# Altium PCB Pillpal_PCB02.PcbDoc
Units mm, origin at the board's own origin, x right, y up, seen from the top; angles counter-clockwise.
Board outline 54 x 65.75 mm, 2 copper layers (Top Layer, Bottom Layer); 30 components, 29 nets, 132 pads, 14 vias.
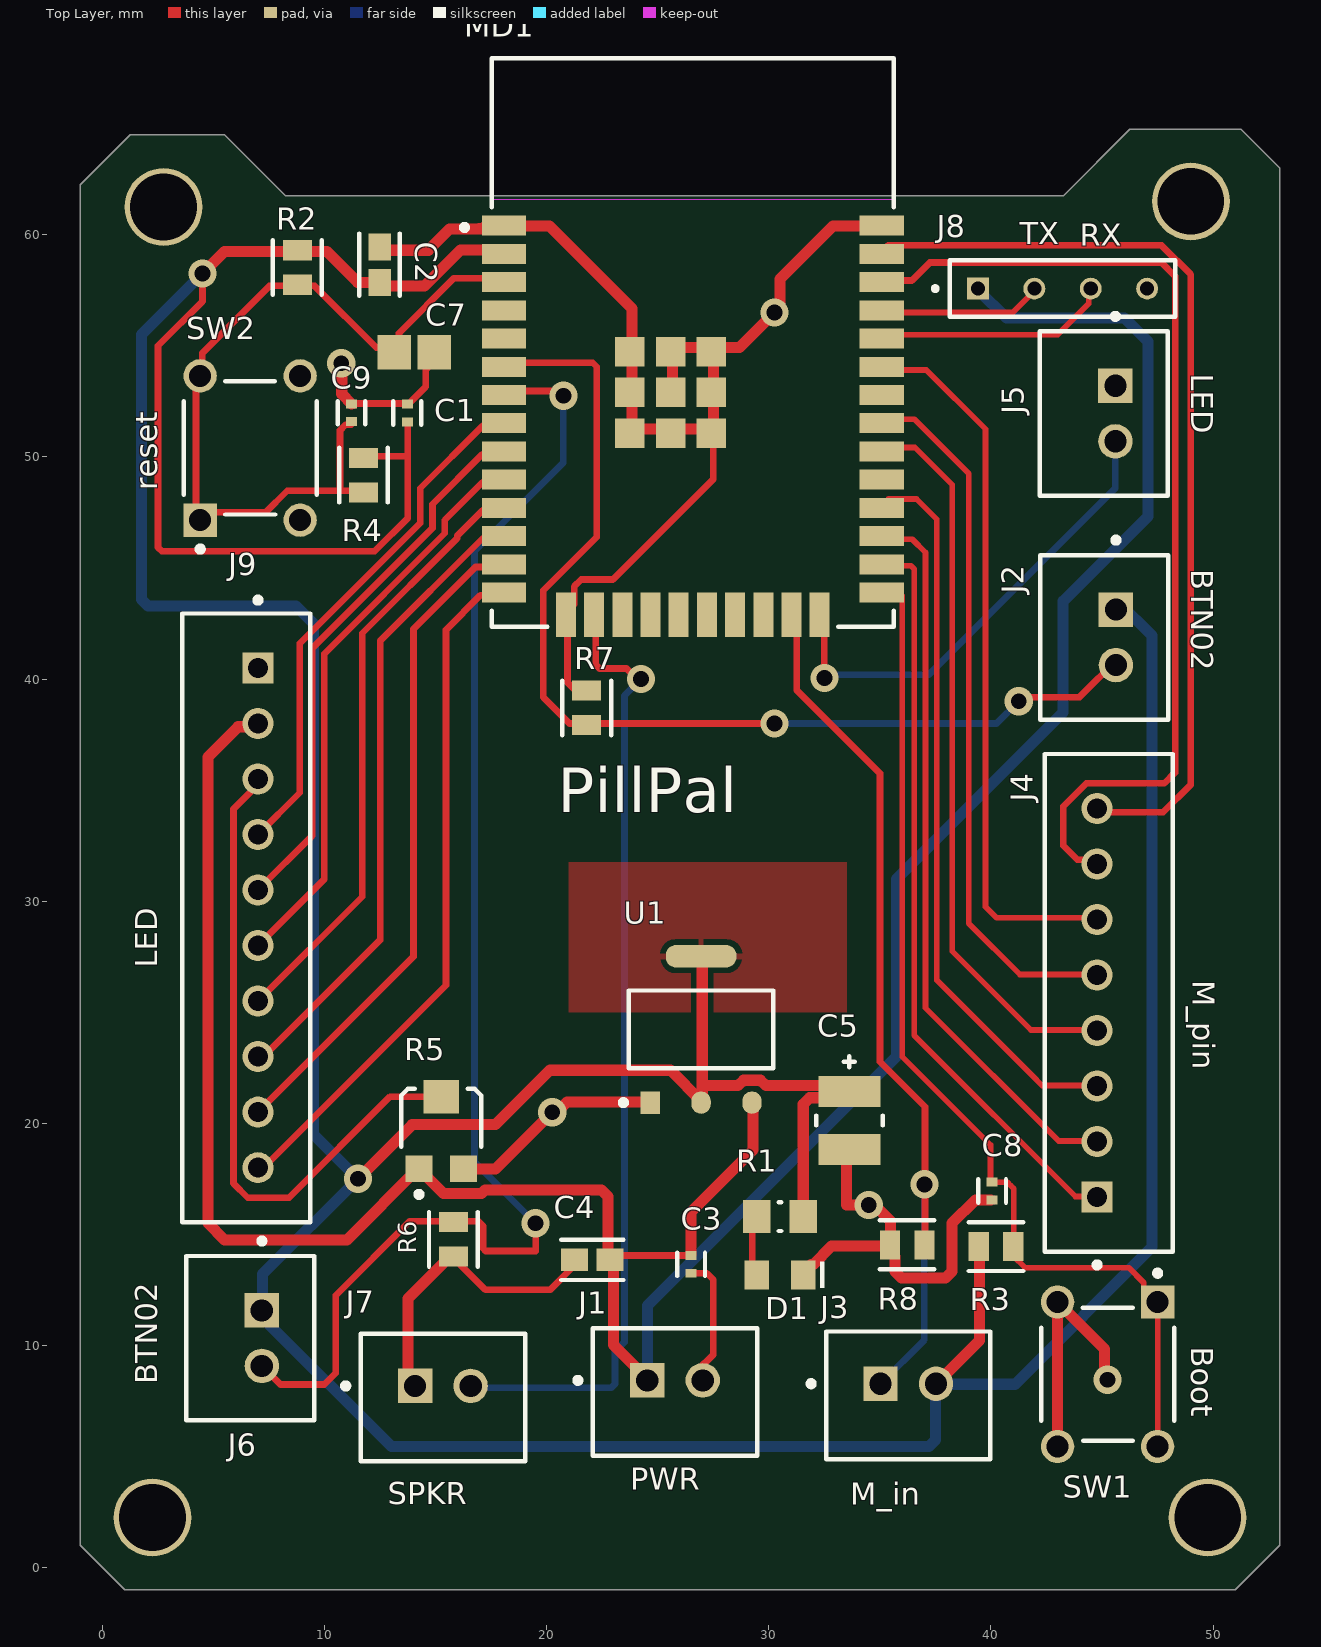
[diagram p0: Top Layer view]
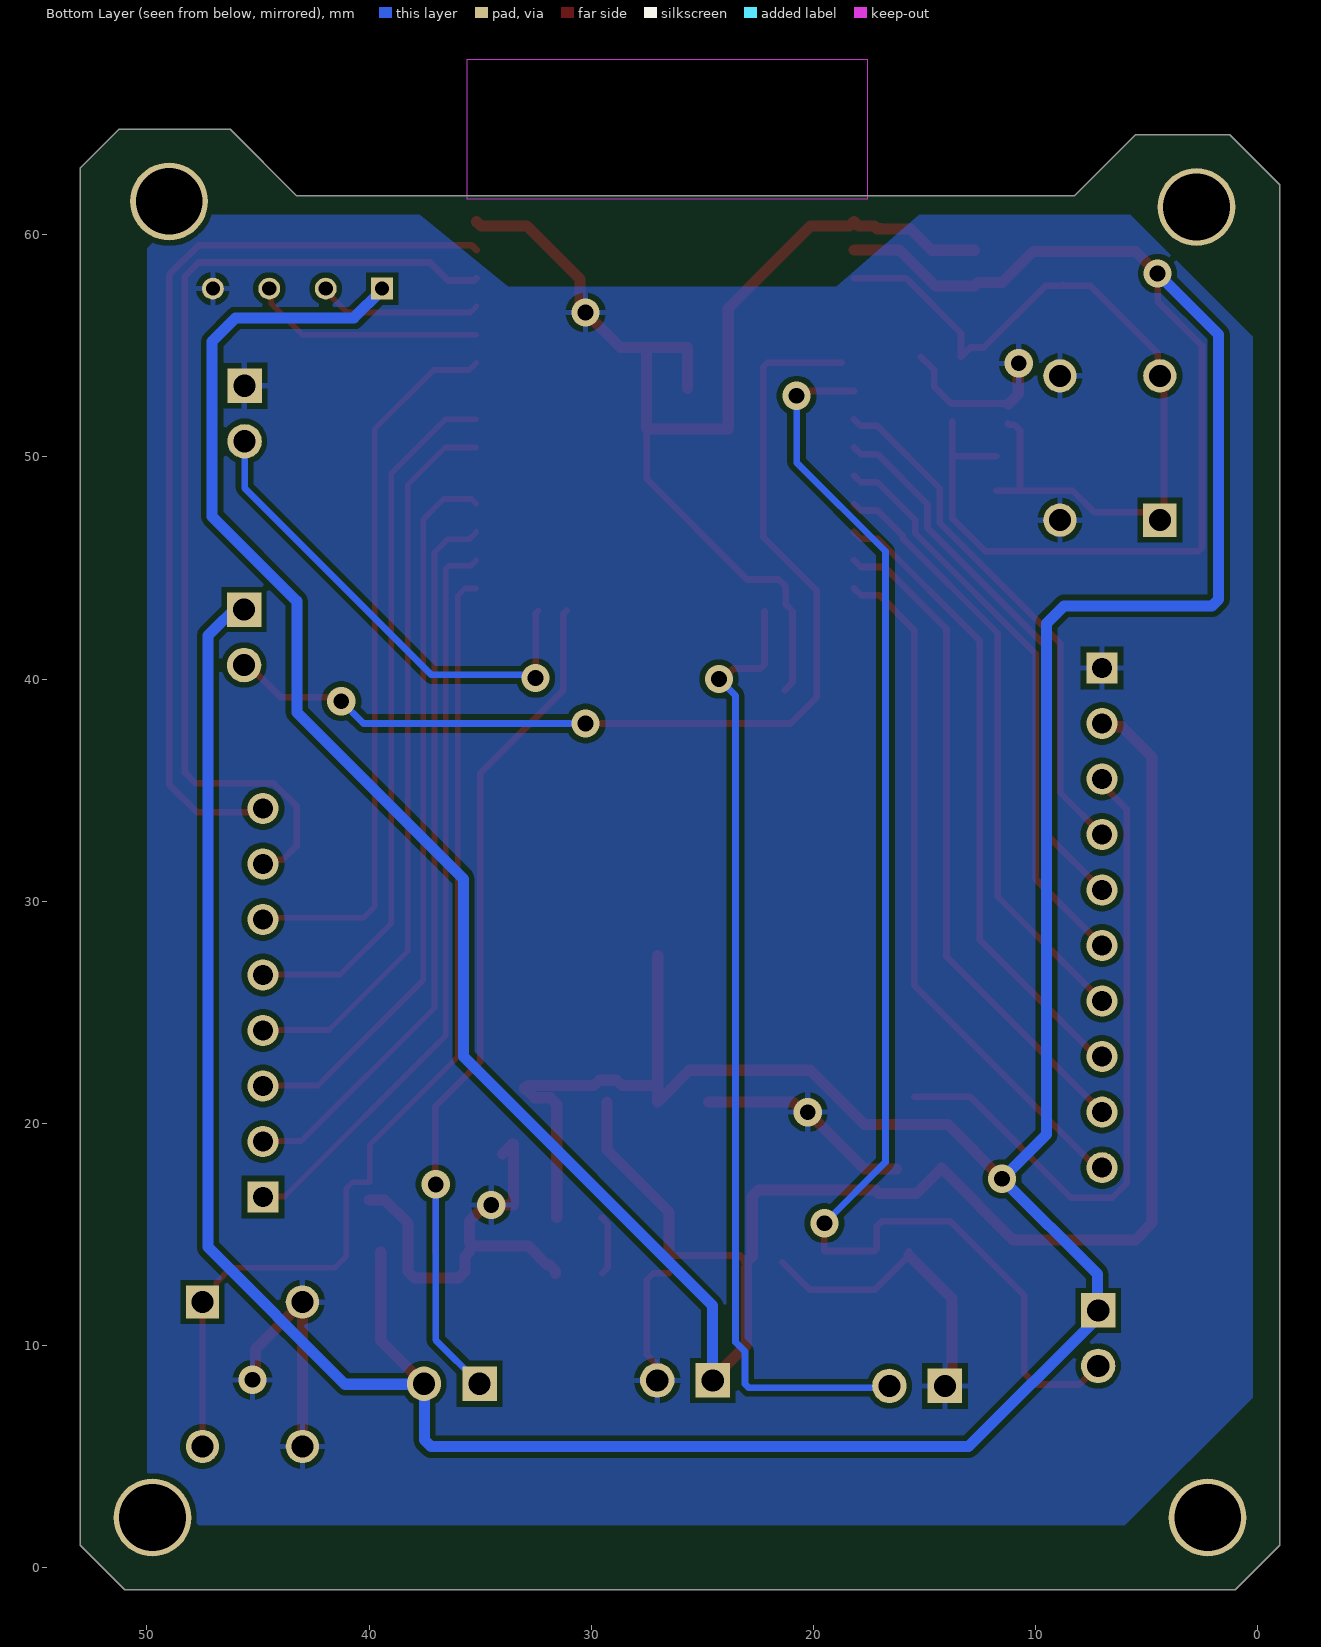
[diagram p1: Bottom Layer view, seen from below]
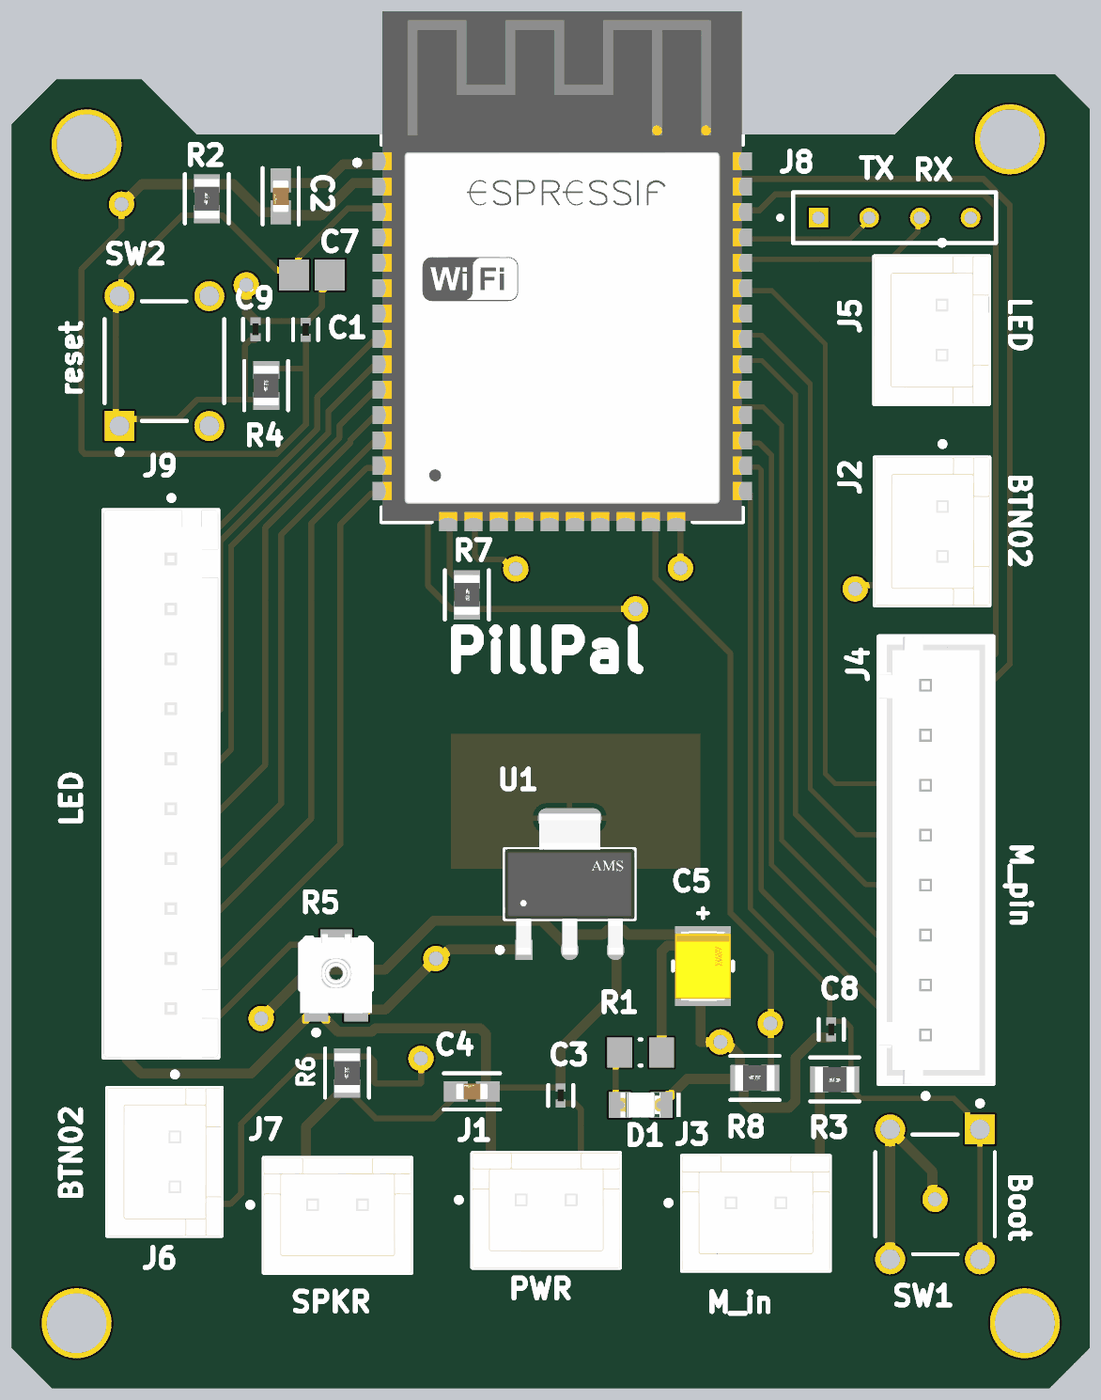
[diagram p2: 3D render of the assembled board from above, using the file's embedded part models]

## Layer stack, top to bottom
Top Solder: solder mask 0.0102, Solder Resist, Dk 3.5
Top Layer: signal copper 0.0356
Dielectric 1: dielectric 0.32, FR-4, Dk 4.8
Bottom Layer: signal copper 0.0356
Bottom Solder: solder mask 0.0102, Solder Resist, Dk 3.5

## Board outline
-1,1 1,-1 51,-1 53,1 53,63 51.25,64.75 46.25,64.75 43.25,61.75 8.25,61.75 5.5,64.5 1.25,64.5 -1,62.25

## Design rules (kind name [scope] priority, off if disabled: settings)
Clearance Clearance_1 [OnMid vs OnMid] p1: gap=0.254 ignorepadtopadclearanceinfootprint=FALSE except(0: Arc-Hole Track-Hole SMDPad-Hole THPad-Hole Via-Hole Fill-Hole Poly-Hole Region-Hole Text-Hole Hole-Hole) sourcerule=36 cellrowname=All cellrowtype=0 cellcolname=All cellcoltype=0 innerlayers=TRUE
Clearance Clearance_2 [(ExistsOnLayer('Top Layer') Or ExistsOnLayer('Bottom Layer')) vs (ExistsOnLayer('Top Layer') Or ExistsOnLayer('Bottom Layer'))] p2: gap=0.254 ignorepadtopadclearanceinfootprint=FALSE except(0: Arc-Hole Track-Hole SMDPad-Hole THPad-Hole Via-Hole Fill-Hole Poly-Hole Region-Hole Text-Hole Hole-Hole) sourcerule=36 cellrowname=All cellrowtype=0 cellcolname=All cellcoltype=0 outerlayers=TRUE
Clearance [All] p3: gap=0.254 ignorepadtopadclearanceinfootprint=FALSE ismatrix=TRUE
HoleSize [All] p1: absolutevalues=TRUE maxlimit=3.5 minlimit=0.025 maxpercent=80.000 minpercent=20.000
MinimumSolderMaskSliver [All] p1: minsoldermaskwidth=0.09
PolygonConnect [All] p1: connectstyle=Relief reliefconductorwidth=0.254 reliefentries=4 polygonreliefangle="90 Angle" airgapwidth=0.254
RoutingVias [All] p1: holewidth=0.711 width=1.27 viastyle="Through Hole" minholewidth=0.711 minwidth=1.27 maxholewidth=0.711 maxwidth=1.27
SilkToSolderMaskClearance [IsPad] p1: minsilkscreentomaskgap=0.18 clearancetoexposedcopper=TRUE
SolderMaskExpansion [All] p1: expansion=0.102 istentingtop=FALSE
Width [All] p1: maxlimit=0.5 minlimit=0.254 preferedwidth=0.3 minimp=50.000000 maximp=50.000000 favimp=50.000000
27 further rules are at their usual default settings.

## Components (designator, comment, footprint, x,y, rotation, side; value= is the part's Value field where it differs from the comment)
C1 "0.1uF" FP-GRM15-MFG 13.725,51.975 r90 top value=0.10μF
C2 "10uF" FP-GRM188-0_1-e0_2_0_55-IPC_A 12.475,58.65 r270 top
C3 "0.1uF" FP-GRM15-MFG 26.5,13.65 r90 top value=0.10μF
C4 "10uF" FP-GRM188-0_1-e0_2_0_55-IPC_A 22.05,13.85 r180 top
C5 "TAJB226K016RNJ" FP-TAJB-MFG 33.625,20.125 r90 top
C7 "1uF" CAPC2013X145X50ML20T25 14.038,54.712 r180 top
C8 "0.1uF" FP-GRM15-MFG 40.05,16.95 r90 top value=0.10μF
C9 "0.1uF" FP-GRM15-MFG 11.212,51.987 r270 top value=0.10μF
D1 "150080RS75000" WL-SMCW_0805_150080xx75000 30.5,13.175 r180 top
J1 "B2B-XH-A(LF)(SN)" FP-B2B-XH-A_LF_SN-MFG 25.775,7.9 r0 top
J2 "B2B-XH-A(LF)(SN)" FP-B2B-XH-A_LF_SN-MFG 45.1,41.875 r270 top
J3 "B2B-XH-A(LF)(SN)" FP-B2B-XH-A_LF_SN-MFG 36.275,7.75 r0 top
J4 "B8B-XH-A(LF)(SN)" FP-B8B-XH-A_LF_SN-MFG 45.3,25.425 r270 top
J5 "B2B-XH-A(LF)(SN)" FP-B2B-XH-A_LF_SN-MFG 45.075,51.95 r270 top
J6 "B2B-XH-A(LF)(SN)" FP-B2B-XH-A_LF_SN-MFG 6.65,10.325 r270 top
J7 "B2B-XH-A(LF)(SN)" FP-B2B-XH-A_LF_SN-MFG 15.325,7.65 r0 top
J8 "TS-104-T-A" SAMTEC_TS-104-T-A 43.22,57.575 r0 top
J9 "B10B-XH-A(LF)(SN)" FP-B10B-XH-A_LF_SN-MFG 6.475,29.25 r90 top
MD1 "ESP32-WROOM-32D" FP-ESP32-WROOM-32D-MFG 26.575,55.145 r0 top
R1 "75R 1% 0805(2012)" RESC0805(2012)_M 30.5,15.8 r180 top value="75.00 Ohm"
R2 "10k" FP-CRG0805-IPC_C 8.775,58.525 r90 top
R3 "10k" FP-CRG0805-IPC_C 40.225,14.45 r180 top
R4 "10k" FP-CRG0805-IPC_C 11.75,49.175 r90 top
R5 "TC33X-2-103E" BOUR-TC33X-2_V 15.25,19.75 r90 top
R6 "10k" FP-CRG0805-IPC_C 15.8,14.775 r90 top
R7 "10k" FP-CRG0805-IPC_C 21.8,38.7 r270 top
R8 "10k" FP-CRG0805-IPC_C 36.225,14.525 r0 top
SW1 "1825910-6" TECO-1825910-6_V 45.25,8.7 r270 top
SW2 "1825910-6" TECO-1825910-6_V 6.65,50.4 r90 top
U1 "AMS1117-3.3" FP-AMS1117-IPC_C 26.95,24.225 r90 top

## Footprints (in the part's own frame and the unit in brackets; to place one, negate y for a bottom-side part, rotate by r counter-clockwise, add the part's x,y. Pads: shape width x height; smd on the part's side, far side on the other; paste and mask are expansions set on the pad)
BOUR-TC33X-2_V [mm] "SMD, 3-Leads, Body 3.8x3.6mm"
  rect 1.2x1.2 smd: 1(-1.8,1) 3(-1.8,-1)
  rect 1.5x1.6 smd: 2(1.45,0)
  silkscreen extent -3.07,-1.8 1.8,1.8, body extent -2,-1.8 1.96,1.8, height 1.15
CAPC2013X145X50ML20T25 [mm] "Chip Capacitor, 2-Leads, Body 2.00x1.25mm, IPC Low Density"
  rect 1.5x1.55 smd: 1(-0.9,0) 2(0.9,0)
  body extent -1.1,-0.72 1.1,0.72, height 1.45
FP-AMS1117-IPC_C [mm]
  rect 1.004x0.872 smd paste+0 mask+0: 1(-3.295,2.29)
  rrect100% 1.004x0.872 smd paste+0 mask+0: 2(-3.295,0) 3(-3.295,-2.29)
  rrect87% 1.004x3.182 smd paste+0 mask+0: 4(3.295,0)
  silkscreen extent -3.42,-3.25 1.75,3.62, body extent -3.9,-3.35 3.9,3.35, height 0.25
FP-B2B-XH-A_LF_SN-MFG [mm]
  rect 1.55x1.55 hole 1 paste-2539.97 mask+0: 1(-1.25,0.525)
  round 1.55 hole 1 paste-2539.97 mask+0: 2(1.25,0.525)
  silkscreen extent -4.5,-2.88 3.7,2.88, body extent -3.8,-2.98 3.8,2.98, height 0.25
FP-B8B-XH-A_LF_SN-MFG [mm]
  rect 1.4x1.4 hole 0.9 paste-2539.97 mask+0: 1(8.75,-0.525)
  round 1.4 hole 0.9 paste-2539.97 mask+0: 2(6.25,-0.525) 3(3.75,-0.525) 4(1.25,-0.525) 5(-1.25,-0.525) 6(-3.75,-0.525) 7(-6.25,-0.525) 8(-8.75,-0.525)
  silkscreen extent -11.2,-2.88 11.92,2.88, body extent -11.3,-2.98 11.3,2.98, height 0.25
FP-B10B-XH-A_LF_SN-MFG [mm]
  rect 1.4x1.4 hole 0.9 paste-2539.97 mask+0: 1(11.25,-0.525)
  round 1.4 hole 0.9 paste-2539.97 mask+0: 2(8.75,-0.525) 3(6.25,-0.525) 4(3.75,-0.525) 5(1.25,-0.525) 6(-1.25,-0.525) 7(-3.75,-0.525) 8(-6.25,-0.525) 9(-8.75,-0.525) 10(-11.25,-0.525)
  silkscreen extent -13.7,-2.88 14.42,2.88, body extent -13.8,-2.98 13.8,2.98, height 0.25
FP-CRG0805-IPC_C [mm]
  rect 0.906x1.307 smd paste+0 mask+0: 1(-0.776,0) 2(0.776,0)
  silkscreen extent -1.23,-1.1 1.23,1.1, body extent -1.33,-0.8 1.33,0.8, height 0.25
FP-ESP32-WROOM-32D-MFG [mm]
  rect 2x0.9 smd paste+0 mask+0: 1(-8.5,5.26) 2(-8.5,3.99) 3(-8.5,2.72) 4(-8.5,1.45) 5(-8.5,0.18) 6(-8.5,-1.09) 7(-8.5,-2.36) 8(-8.5,-3.63) 9(-8.5,-4.9) 10(-8.5,-6.17) 11(-8.5,-7.44) 12(-8.5,-8.71) 13(-8.5,-9.98) 14(-8.5,-11.25) 25(8.5,-11.25) 26(8.5,-9.98) 27(8.5,-8.71) 28(8.5,-7.44) 29(8.5,-6.17) 30(8.5,-4.9) 31(8.5,-3.63) 32(8.5,-2.36) 33(8.5,-1.09) 34(8.5,0.18) 35(8.5,1.45) 36(8.5,2.72) 37(8.5,3.99) 38(8.5,5.26)
  rect 0.9x2 smd paste+0 mask+0: 15(-5.715,-12.25) 16(-4.445,-12.25) 17(-3.175,-12.25) 18(-1.905,-12.25) 19(-0.635,-12.25) 20(0.635,-12.25) 21(1.905,-12.25) 22(3.175,-12.25) 23(4.445,-12.25) 24(5.715,-12.25)
  rect 1.33x1.33 smd paste+0 mask+0: 39(-2.835,-4.075) 39(-2.835,-2.24) 39(-2.835,-0.405) 39(-1,-4.075) 39(-1,-2.24) 39(-1,-0.405) 39(0.835,-4.075) 39(0.835,-2.24) 39(0.835,-0.405)
  Keep-Out Layer region: -9,6.45 9,6.45 9,12.75 -9,12.75
  Keep-Out Layer region: -9,6.45 9,6.45 9,12.75 -9,12.75
  silkscreen extent -10.4,-12.8 9.05,12.8, body extent -9.6,-13.35 9.6,12.9, height 0.25
FP-GRM15-MFG [mm]
  rect 0.4x0.5 smd paste+0 mask+0: 1(-0.4,0) 2(0.4,0)
  silkscreen extent -0.53,-0.63 0.53,0.63, body extent -0.7,-0.38 0.7,0.38, height 0.25
FP-GRM188-0_1-e0_2_0_55-IPC_A [mm]
  rect 1.208x1.012 smd paste+0 mask+0: 1(-0.802,0) 2(0.802,0)
  silkscreen extent -1.41,-0.91 1.41,0.91, body extent -1.91,-1.01 1.91,1.01, height 0.25
FP-TAJB-MFG [mm]
  rect 1.4x2.8 smd paste+0 mask+0: 1(-1.3,0) 2(1.3,0)
  silkscreen extent -0.23,-1.5 2.9,1.5, body extent -2.1,-1.6 2.1,1.6, height 0.25
RESC0805(2012)_M [mm] "Chip Resistor, Body 2.0x1.3mm, IPC Low Density"
  rect 1.25x1.5 smd: 1(-1.05,0) 2(1.05,0)
  silkscreen extent -0.05,-0.65 0.05,0.65, body extent -1.1,-0.67 1.1,0.67, height 0.7
SAMTEC_TS-104-T-A [mm]
  rect 0.985x0.985 hole 0.635: 01(-3.81,0)
  round 0.985 hole 0.635: 02(-1.27,0) 03(1.27,0) 04(3.81,0)
  silkscreen extent -5.83,-1.27 5.08,1.27
TECO-1825910-6_V [mm] "Switch, 4-Leads, Body 5.99x5.99mm"
  rect 1.5x1.5 hole 0.99: 1(-3.25,2.25)
  round 1.5 hole 0.99: 2(3.25,2.25) 3(-3.25,-2.25) 4(3.25,-2.25)
  silkscreen extent -4.67,-2.99 2.99,3, body extent -3,-2.99 2.99,3, height 5
WL-SMCW_0805_150080xx75000 [mm] "SMD Mono-color Chip LED, body 2.0x1.25mm"
  rect 1.1x1.3 smd: 1(-1.05,0) 2(1.05,0)
  silkscreen extent -2,-0.6 -1.8,0.6, body extent -1,-0.63 1,0.62, height 0.7

## Part data
C1 C3 C8 C9: library part CMP-2100-03641-2, "CAP CER 0.1UF 16V X7R 0402", Capacitance=0.10μF, Manufacturer=Murata, Manufacturer Part Number=GRM155R71C104KA88D, Package=GRM15, Temperature="-55°C to +125°C", Temperature Characteristic=X7R, Temperature Range High=+125°C, Temperature Range Low=-55°C, Tolerance=10%, Voltage Rating=16Vdc, Category=Cap, ComponentLink2Description=Datasheet, ComponentLink2URL=https://search.murata.co.jp/Ceramy/image/img/A01X/G101/ENG/GRM155R71H471KA01-01A.pdf, Device Class L1="Passive Components", Device Class L2=Capacitors, Device Class L3="Ceramic Capacitors", Digikey Description="CAP CER 0.1UF 16V X7R 0402", Height=0.55mm, Ipc Land Pattern Name=CAPC10050X219, Lead Free=yes, Material=Ceramic, Mouser Description="0402 0.1 uF 16V ±10 % Tolerance X7R SMT Multilayer Ceramic Capacitor", Octopart=https://octopart.com/grm155r71c104ka88d-murata-196880, RoHS=TRUE, Standoff Height=0mm
C2 C4: library part CMP-2006-02792-2, "Chip Multilayer Ceramic Capacitors for General Purpose, 0603, 10uF, X5R, 15%, 20%, 6.3V", Case Code (Imperial)=0603, Case Code (Metric)=1608, Dielectric=X5R, Max Operating Temperature=85°C, Min Operating Temperature=-55°C, Package Quantity=4000, Tolerance=20%, Voltage=6.3V, Capacitance=10uF, Case/Package=0603, Depth=0.8mm, Height=0.8mm, Lead Free="Lead Free", Length=1.6mm, Material=Ceramic, Mount="Surface Mount", Packaging="Tape and Reel", Radiation Hardening=No, REACH SVHC="No SVHC", Termination=SMD/SMT, Thickness=0.035inch, Voltage Rating=6.3V, Voltage Rating (DC)=6.3V, Width=0.031inch
C5: library part CMP-2100-03689-2, "22uF 16V  ±10% 2.3Ω 1210  SMD Tantalum Capacitor", Capacitance=22uF, Case Code (Imperial)=1210, Case Code (Metric)=3528, Dielectric Material=Tantalum, ESR (Equivalent Series Resistance)=2.3R, Leakage Current=3.5uA, Max Operating Temperature=125°C, Min Operating Temperature=-55°C, Package Quantity=1, Tolerance=10%, Voltage=16V, Case/Package=1210, Construction=Flat, Depth=2.8mm, Dissipation Factor=6%, Features="General Purpose", Height=1.9mm, Height - Seated (Max)=0.083inch, Lead Free="Lead Free", Length=3.5mm, Mount="Surface Mount", Number of Pins=2, Packaging="Tape and Reel", Polarity=Polar, Radiation Hardening=No, REACH SVHC="No SVHC", RoHS Compliant=Yes, Series=TAJ, Termination=SMD/SMT, Voltage Rating=16V, Voltage Rating (DC)=16V, Width=2.8mm
C7: library part CMP-1036-04731-2, Manufacturer=Kemet, Part Number=C0805C105K9PACTU
D1: library part CMP-1426-00011-2, Case Code (Imperial)=0805, Case Code (Metric)=2012, Color=Red, Forward Current=100mA, Forward Voltage=2V, Max Operating Temperature=85°C, Max Reverse Voltage (DC)=5V, Min Operating Temperature=-40°C, Test Current=20mA, Case/Package=0805, Dominant Wavelength=625nm, Height=700µm, Length=2mm, Lens Style="Clear, Rectangular", Luminous Intensity=150mcd, Mount="Surface Mount", NexarPartId=29717781, Packaging="Tape and Reel", Peak Wavelength=630nm, REACH SVHC=Unknown, RoHS=Compliant, Viewing Angle=140°, Wavelength=625nm, Width=1.25mm
J1 J2 J3 J5 J6 J7: library part CMP-2000-05888-3, "CONN HEADER VERT 2POS 2.5MM", Color=Natural, Contact Resistance=20mR, Current Rating=3A, Housing Color=White, Insulation Resistance=1GR, Max Operating Temperature=85°C, Max Voltage Rating (AC)=250V, Min Operating Temperature=-25°C, Connector Type="Male Pin", Contact Material=Brass, Contact Plating=Tin, Contact Type="Male Pin", Depth=5.75mm, Fastening Type=Detent, Housing Material=Polyamide, Lead Free="Lead Free", Lead Pitch=2.5mm, Length=7.4mm, Max Current Rating=3A, Max Voltage Rating (DC)=250V, Mount="Through Hole", Number of Contacts=2, Number of Positions=2, Number of Rows=1, Orientation=Straight, Packaging=Bulk, Pitch=2.5mm, REACH SVHC="No SVHC", Series=XH, Termination=Solder, Voltage Rating=250V, Voltage Rating (AC)=250V, Wire/Cable Gauge=22AWG
J4: library part CMP-17438-000015-1, "CONN HEADER VERT 8POS 2.5MM", Color=Natural, Contact Resistance=20mR, Current Rating=3A, Housing Color=White, Insulation Resistance=1GR, Max Operating Temperature=85°C, Max Voltage Rating (AC)=250V, Min Operating Temperature=-25°C, Connector Type="Male Pin", Contact Material=Brass, Contact Plating=Tin, Contact Type="Male Pin", Depth=5.75mm, Fastening Type=Detent, Housing Material=Polyamide, Lead Free="Lead Free", Lead Pitch=2.5mm, Length=22.4mm, Max Current Rating=3A, Mount="Through Hole", Number of Contacts=8, Number of Positions=8, Number of Rows=1, Orientation=Straight, Packaging=Bulk, Pitch=2.5mm, REACH SVHC="No SVHC", Series=XH, Termination=Press-Fit, Voltage Rating=250V, Voltage Rating (AC)=250V, Wire/Cable Gauge=22AWG
J8: "TS - Samtec 2.54mm Single Row Machined Terminal Strip - Fast Stock", Package=None, Supplier Part Number 1=SAM1112-04-ND, Availability="In Stock", Check_prices=https://www.snapeda.com/parts/TS-104-T-A/Samtec+Inc./view-part/?ref=eda, MF="Samtec Inc.", MP=TS-104-T-A, Price=None, Purchase-URL=https://pricing.snapeda.com/search/part/TS-104-T-A/?ref=eda, SnapEDA_Link=https://www.snapeda.com/parts/TS-104-T-A/Samtec+Inc./view-part/?ref=snap, Supplier 1=Digikey
J9: library part CMP-17439-000145-1, "CONN HEADER VERT 10POS 2.5MM", Color=Natural, Contact Resistance=20mR, Current Rating=3A, Flammability Rating="UL94 V-0", Housing Color=White, Insulation Resistance=1GR, Max Operating Temperature=85°C, Max Voltage Rating (AC)=250V, Min Operating Temperature=-25°C, Connector Type=Header, Contact Finish - Mating=TIN, Contact Material=Brass, Contact Plating=Tin, Contact Shape=Square, Contact Type="Male Pin", Depth=5.75mm, Fastening Type=Detent, Gender=Male, Housing Material=Polyamide, Insulation Color=Natural, Insulation Material=Nylon, Lead Free="Lead Free", Lead Pitch=2.5mm, Length=27.4mm, Mated Stacking Heights=9.8mm, Max Current Rating=3A, Max Voltage Rating (DC)=250V, Mount="Through Hole", Number of Contacts=10, Number of Positions=10, Number of Rows=1, Orientation=Straight, Packaging=Bulk, Pitch=2.5mm, REACH SVHC="No SVHC", Series=XH, Termination=Solder, Voltage Rating=250V, Voltage Rating (AC)=250V, Wire/Cable Gauge=22AWG
MD1: library part CMP-194065-000003-1, "WIFI MODULE 32MBITS SPI FLASH", Manufacturer="Espressif Systems", Max Frequency=2484MHz, Max Supply Voltage=3.6V, Min Supply Voltage=3V, Nominal Supply Current=500mA, Temperature="-40°C to +85°C", Temperature Range High=+85°C, Temperature Range Low=-40°C, Automotive=No, Bandwidth=72MHz, Category=UNK, ComponentLink2Description=Datasheet, ComponentLink2URL=https://www.espressif.com/sites/default/files/documentation/esp32-wroom-32d_esp32-wroom-32u_datasheet_en.pdf, Data Rate=150Mbits/s, Device Class L1="Integrated Circuits (ICs)", Device Class L2="RF Semiconductors and Devices", Device Class L3=Transceivers, Digikey Description="WIFI MODULE 32MBITS SPI FLASH", Height=3.2mm, Interface=I2C,SPI,UART,Ethernet,I2S,Other, Lead Free=Yes, Manufacturer Part Number=ESP32-WROOM-32D, Mouser Description="Wi-Fi/BT BLE Module ESP32-D0WD, SPI Flash, UART, P", Number Of Adc Channels=16, Number Of Gpio=32, Octopart=https://octopart.com/esp32-wroom-32d-espressif+systems-91040050, Package=ESP32-WROOM-32D, RoHS=TRUE, Sensitivity=-98dBm
R1: library part CMP-1013-00383-1, "75R 0.125W 1% 0805 (2012 Metric)  SMD", Case-EIA=0805, Case-Metric=2012, Power="0.125 W", Tolerance="1 %", Technology=SMT
R2 R3 R4 R6 R7 R8: library part CMP-03211-011401-1, "RES SMD 10K OHM 1% 1/8W 0805", Case/Package=0805, Max Operating Temperature=125°C, Min Operating Temperature=-55°C, Number of Resistors=1, Power Rating=125mW, Resistance=10kR, Resistor Type="Thick Film", Temperature Coefficient=100ppm/°C, Tolerance=1%, Voltage Rating=150V, Depth=1.25mm, ELV=Compliant, Height=0.55mm, Length=2mm, Mount="Surface Mount", Number of Terminations=2, Packaging="Tape and Reel", Radiation Hardening=No, RoHS Compliant=Yes, Series="CRG Series", Technology="THICK FILM", Termination=Solder
R5: library part CMP-2100-03695-1, "Trimming Potentiometer, 10000 Ohm, -40 to 100 degC, 3-Pin SMD, RoHS, Tape and Reel", Case/Package=SMD/SMT, Colour=Silver, Manufacturer=Bourns, Max Operating Temperature=100degC, Max Power Dissipation=100mW, Min Operating Temperature=-40degC, Package Description="3-Pin Surface Mount Device, Body 3.8 x 3.6 mm", Package Quantity=2500, Package Reference=TC33X-2, Resistance=10KOhm, Temperature Coefficient=250ppm/degreesC, Tolerance=25%, Voltage Rating (DC)=50V, Composition=Potentiometer, Contact Plating=Silver, Datasheet URL=http://www.bourns.com/docs/Product-Datasheets/TC33.pdf, Datasheet Version=42583.0, Depth=3.8mm, Height=0.047inch, Lead Free=LeadFree, Length=3mm, Manufacturer URL=http://www.bourns.com/, Military Standard=Not, Mount=SurfaceMount, Number of Turns=1, Packaging=TapeandReel, Power Rating=100mW, Radiation Hardening=No, REACH SVHC=NoSVHC, RoHSCompliant=true, Taper=Linear, Termination=FootPrint, Weight=29.4mg, Width=0.118inch
SW1 SW2: library part CMP-1684-00021-1, "Tact Switch, SPST-NO, 0.05 A, -35 to 85 degC, 4-Pin THD, RoHS, Bulk", Actuator Color=Black, Contact Rating @ Voltage=0.05A@24VDC, Dielectric Strength=500VAC, Manufacturer="TE Connectivity", Maximum AC Voltage Rating=N/A, Maximum Contact Resistance=100mOhm, Maximum DC Voltage Rating=24V, Minimum Insulation Resistance=100MOhm, Operating Temperature=-35to85C, Package Description="4-Pin Through Hole Device, Body 5.99 x 5.99 mm, Pitch 6.5 mm", Package Reference=THD, Actuator Length=1.4mm, Actuator Material=PolybutyleneTerephthalate, Actuator Style=RoundButton, Base Material=N/A, Body Orientation=Straight, Bushing Type=Unthreaded, Contact Material=CopperAlloy, Contact Plating=Silver, Datasheet URL=http://www.te.com/commerce/DocumentDelivery/DDEController?Action=showdoc&DocId=Customer+Drawing%7F1825910%7FC9%7Fpdf%7FEnglish%7FENG_CD_1825910_C9.pdf%7F1825910-6, Datasheet Version="Rev. C9", Dimension=5.99x5mm, Electrical Life=100000Cycles, Family=1825910, Function=MomentaryContact, Housing Material=N/A, Illumination=N/R, Manufacturer URL=http://www.te.com, Mechanical Life=100000Cycles, Mounting=ThroughHole, Packaging=N/A, Part No=1825910-6, Pole Throw Configuration=SPST, Product Weight=N/A, RoHS=Yes, Seal Description=N/A, Seal Location=N/A, Switch Configuration=OFF(ON), Terminal Type=PCPins, Thread Size=N/R
U1: library part CMP-209535-000001-1, "LDO Voltage Regulators 1A, 3.3V", Dropout Voltage=1.1V, Manufacturer="Advanced Monolithic Systems", Max Junction Temp=+125°C, Max Power Dissipation=1.2W, Max Supply Voltage=15V, Nominal Supply Current=5mA, Output Current=1A, Output Voltage=3.3V, Package=AMS1117, Temperature="-40°C to +125°C", Temperature Range Low=-40°C, Automotive=No, Category=IC, ComponentLink2Description=Datasheet, ComponentLink2URL=http://www.advanced-monolithic.com/pdf/ds1117.pdf, Device Class L1="Integrated Circuits (ICs)", Device Class L2="Power Management ICs", Device Class L3="Voltage Regulators - Linear", Height=1.8mm, Ipc Land Pattern Name=SOT229P700X180-4, Lead Free=Yes, Manufacturer Part Number=AMS1117-3.3, Number Of Outputs=1, Octopart=https://octopart.com/ams1117-3.3-advanced+monolithic+systems-25899300, Output Type=Fixed, RoHS=TRUE, Standoff Height=0.64mm, Temperature Range High=+125°C

## Free pads (board coordinates)
  round 3.5 hole 3: 6(2.75,61.25) 7(49,61.5) 8(49.75,2.25) 9(2.25,2.25)

## Via types
v1: diameter 1.27, hole 0.711, Top Layer to Bottom Layer, 14 vias

## Nets (pads, with @x,y where several pads share a name; then routed paths per layer and width w, separated by ;. In a path a pad name is that pad's centre, name@x,y a point inside that pad or via, vN(x,y) a via of type N, cw(c..) or ccw(c..) an arc to the next point about the centre after c; other vN are vias at no path point)
+5: C3.2 C4.1 J1.1 J8.01 J9.2 R5.1 U1.3 | length 128.5
  Top Layer w0.3: C4.1@23,13.75 23.3,14.05 C3.2
  Top Layer w0.5: J9.2 6.85,37.85 6.1,37.85 4.747,36.497 4.747,15.503 5.5,14.75 11,14.75 R5.1@14.225,17.975 ; R5.1 15.354,16.846 17.059,16.846 17.213,17 22.457,17 22.75,16.707 22.75,14 C4.1@23,13.75 ; C4.1@23,13.5 23,10.025 J1.1@24.25,8.775 ; C3.2@26.5,14.093 26.5,14.493 26.5,16 29.29,18.79 U1.3@29.29,20.955
  Bottom Layer w0.5: J1.1@24.25,8.775 24.543,9.068 24.543,11.793 35.75,23 35.75,31 43.25,38.5 43.25,43.5 47.064,47.314 47.064,55.186 46,56.25 40.69,56.25 J8.01@39.44,57.5
CHIP_PU: C7.2 C9.2 MD1.3 R2.1 R4.1 SW2.1 SW2.2 | length 38.4
  Top Layer w0.3: SW2.2@4.212,53.962 SW2.1@4.212,47.237 ; SW2.2 4.486,53.736 4.486,54.661 7.523,57.698 8.724,57.698 R2.1 ; SW2.1@4.653,47.625 4.653,47.237 SW2.1@4.212,47.237 ; R2.1@8.775,57.698 9.552,57.698 12.326,54.924 12.926,54.924 13.35,54.5 13.35,55.566 15.829,58.045 MD1.3@18.165,58.045 ; C9.2@11.25,51.5 11.2,51.45 10.95,51.45 10.692,51.192 10.692,48.474 ; R4.1@11.75,48.474 10.692,48.474 ; SW2.1@4.212,47.237 4.475,47.5 4.653,47.5 7.343,47.5 8.317,48.474 10.692,48.474
GND: C1.2 C2.1 C3.1 C4.2 C5.1 C7.1 C8.1 C9.1 D1.1 J1.2 J5.1 J7.1 J8.04 J9.1 MD1.1 MD1.15 MD1.38 MD1.39 R5.3 R6.1 R7.1 R8.1 SW1.3 SW1.4 SW2.3 SW2.4 U1.1 | length 122.5
  Top Layer w0.3: C9.1@11.25,52.3 11.3,52.3 11.4,52.4 13.75,52.4 13.8,52.4 14.55,53.15 14.55,53.9 C7.1@15.15,54.5 ; R6.1@15.698,14.25 15.698,14.049 17.247,12.5 20.146,12.5 C4.2@21.396,13.75 ; MD1.15@20.935,43.05 20.935,39.841 21.224,39.552 R7.1@21.276,39.5 ; MD1.15@20.95,43.075 21.235,43.36 21.235,44.16 21.554,44.479 22.979,44.479 27.5,49 MD1.39@27.5,51.25 ; C3.1 27.207,13.25 27.5,12.957 27.5,9.593 26.75,8.843 J1.2@26.75,8.775
  Top Layer w0.5: v1(10.75,54.211) 10.773,54.188 10.773,52.826 C9.1 ; C2.1@12.75,59.302 14.669,59.302 15.617,60.25 16.937,60.25 16.956,60.269 17.122,60.269 17.238,60.385 17.965,60.385 18.165,60.585 18.365,60.385 20.115,60.385 23.83,56.67 23.83,54.92 23.83,53.085 23.83,51.25 25.665,51.25 27.5,51.25 27.5,53.085 MD1.39@27.5,54.92 ; J7.1@14.228,8.471 13.894,8.471 13.75,8.615 13.75,12.102 13.798,12.15 R6.1@15.698,14.049 ; R5.3 17.7,17.95 v1(20.25,20.5) 20.458,20.5 20.913,20.955 U1.1@24.71,20.955 ; MD1.39@25.665,53.085 25.665,54.92 MD1.39@27.5,54.92 ; D1.1@31.6,13.25 31.6,13.35 31.9,13.65 32,13.65 32.826,14.476 35.271,14.476 35.399,14.604 35.474,14.604 35.474,15.604 34.975,16.103 34.647,16.103 v1@34.5,16.25 ; C5.1@34,18.625 33.55,19.075 33.5,19.075 33.5,16.325 v1(34.5,16.325) ; MD1.38@35.165,60.585 34.965,60.385 32.885,60.385 30.5,58 30.5,56.75 28.67,54.92 MD1.39@27.5,54.92 ; R8.1@35.474,14.273 35.474,14.2 35.677,13.997 35.677,13.335 35.97,13.042 37.957,13.042 38.25,13.335 38.25,15.5 39.3,16.55 C8.1@40,16.55 ; SW1.4 SW1.3 45.115,9.835 45.115,8.585 v1(45.25,8.45)
  other v1: 30.25,56.5
GPIO: C8.2 MD1.25 R3.1 SW1.1 SW1.2 | length 47.2
  Top Layer w0.254: MD1.25@35.165,44.075 35.677,44.075 36,43.752 36,23 39.975,19.025 39.975,17.35 40.731,17.35 40.877,17.204 41.026,17.055 41.026,14.2 41.026,13.999 41.526,13.5 46.2,13.5 46.877,12.823 46.877,12.573 SW1.1 SW1.2
IO2: J5.2 MD1.24 | length 22.2
  Top Layer w0.3: MD1.24@32.38,43.075 32.5,42.955 v1(32.5,40.039)
  Bottom Layer w0.3: v1(32.5,40.039) 32.647,40.186 37.186,40.186 45.6,48.6 J5.2 ; J5.2@45.75,50.35 J5.2@46.15,50.35
IO4: J4.1 MD1.26 | length 33.7
  Top Layer w0.254: MD1.26@35.165,45.345 35.414,45.096 36.397,45.096 36.546,44.948 36.546,23.954 43.8,16.7 J4.1@44.75,16.7
IO12: J9.10 MD1.14 | length 31.4
  Top Layer w0.3: J9.10@7,17.75 15.462,26.212 15.462,42.212 17.025,43.775 17.865,43.775 MD1.14@18.165,44.075
IO13: J7.2 MD1.16 | length 43.7
  Top Layer w0.3: MD1.16@22.199,43.054 22.199,40.651 22.375,40.475 23.589,40.475 24.064,40 v1(24.25,40)
  Bottom Layer w0.3: J7.2@16.347,8.09 22.895,8.09 23.071,8.266 23.071,9.717 23.5,10.146 23.5,39.25 v1(24.25,40)
IO14: J9.9 MD1.13 | length 30.1
  Top Layer w0.3: J9.9 14,27.5 14,42.25 16.795,45.045 17.865,45.045 MD1.13@18.165,45.345
IO15: J3.1 MD1.23 R8.2 | length 41.2
  Top Layer w0.3: MD1.23@31.11,43.075 31.25,42.935 31.25,39.5 35,35.75 35,22.771 37.026,20.745 R8.2@37.026,14.2
  Bottom Layer w0.3: J3.1@35,8.25 37,10.25 v1(37,17.25)
IO16: J4.2 MD1.27 | length 32.9
  Top Layer w0.254: MD1.27@35.165,46.615 35.488,46.292 36.458,46.292 37.054,45.696 37.054,25.196 43.05,19.2 J4.2@44.75,19.2
IO17: J4.3 MD1.28 | length 32.8
  Top Layer w0.254: MD1.28@35.165,47.885 35.383,48.103 36.647,48.103 37.562,47.188 37.562,26.438 41.835,22.165 42.3,21.7 J4.3@44.75,21.7
IO18: J4.4 MD1.30 | length 32.7
  Top Layer w0.254: MD1.30@35.165,50.425 36.575,50.425 38.25,48.75 38.25,27.75 41.8,24.2 J4.4@44.75,24.2
IO19: J4.5 MD1.31 | length 31.8
  Top Layer w0.254: MD1.31@35.165,51.695 36.555,51.695 39,49.25 39,29 41.3,26.7 J4.5@44.75,26.7
IO21: J4.6 MD1.33 | length 32.5
  Top Layer w0.254: MD1.33@35.165,54.235 35.488,53.912 37.088,53.912 39.75,51.25 39.75,29.75 40.25,29.25 J4.6@44.75,29.25
IO22: J4.7 MD1.36 | length 45.4
  Top Layer w0.3: MD1.36@35.165,58.045 35.271,57.939 36.439,57.939 37.25,58.75 47.67,58.75 48.289,58.131 48.289,35.789 47.804,35.304 44.293,35.304 43.25,34.261 43.25,32.5 43.887,31.863 44.587,31.863 J4.7@44.75,31.7
IO23: J4.8 MD1.37 | length 42.3
  Top Layer w0.3: MD1.37@35.165,59.315 35.37,59.52 47.683,59.52 49,58.204 49,35.25 47.75,34 44.95,34 J4.8@44.75,34.2
IO25: J9.6 MD1.10 | length 26.5
  Top Layer w0.3: J9.6@6.987,27.737 6.987,27.987 9.99,30.99 9.99,41.14 15.412,46.562 15.412,47.153 17.114,48.855 17.865,48.855 MD1.10@18.165,49.155
IO26: J9.7 MD1.11 | length 27.7
  Top Layer w0.3: J9.7@6.987,25.237 6.987,25.487 11.696,30.196 11.696,42.062 15.966,46.332 15.966,46.437 17.114,47.585 17.865,47.585 MD1.11@18.165,47.885
IO27: J9.8 MD1.12 | length 29
  Top Layer w0.3: J9.8@6.987,22.737 12.5,28.25 12.5,41.717 17.098,46.315 17.865,46.315 MD1.12@18.165,46.615
IO32: J9.4 MD1.8 | length 24
  Top Layer w0.3: J9.4@7,32.75 J9.4 8.882,34.882 8.882,41.599 14.304,47.021 14.304,48.585 17.114,51.395 17.865,51.395 MD1.8@18.165,51.695
IO33: J9.5 MD1.9 | length 25.3
  Top Layer w0.3: J9.5@6.987,30.237 6.987,30.487 9.436,32.936 9.436,41.369 14.858,46.791 14.858,47.869 17.114,50.125 17.865,50.125 MD1.9@18.165,50.425
IO34: J2.2 MD1.6 R7.2 | length 47.1
  Top Layer w0.3: MD1.6@18.715,54.235 22.074,54.235 22.25,54.059 22.25,46.396 19.85,43.996 19.85,39.173 21.023,38 21.8,38 v1(30.25,38) ; v1(41.25,39) 41.436,39.186 43.986,39.186 J2.2@45.75,40.95
  Bottom Layer w0.3: v1(30.25,38) 40.25,38 v1(41.25,39)
IO35: J6.2 MD1.7 R6.2 | length 62.8
  Top Layer w0.3: J6.2@7.212,8.737 7.513,8.737 8.013,8.237 9.987,8.237 10.5,8.75 10.5,12.25 13.846,15.596 16.904,15.596 17.146,15.354 17.146,14.354 17.25,14.25 19.5,14.25 v1(19.5,15.5) ; MD1.7@18.165,52.965 20.75,52.965 v1(20.75,52.75)
  Bottom Layer w0.3: v1(19.5,15.5) 16.75,18.25 16.75,45.75 20.75,49.75 v1(20.75,52.75)
NetD1_2: D1.2 R1.2 | length 2.8
  Top Layer w0.3: R1.2@29.45,15.747 29.535,15.747 29.426,15.638 29.25,15.462 29.25,13.5 D1.2@29.5,13.25
NetJ9_3: J9.3 R5.2 | length 30.1
  Top Layer w0.3: J9.3@7,35.25 5.896,34.146 5.896,17.293 6.543,16.646 8.396,16.646 12.95,21.2 R5.2@15.461,21.2
RX: J8.03 MD1.34 | length 10.5
  Top Layer w0.254: MD1.34@35.165,55.505 43.005,55.505 44.396,56.896 44.396,57.376 J8.03@44.52,57.5
TX: J8.02 MD1.35 | length 7.3
  Top Layer w0.254: MD1.35@35.165,56.775 35.44,56.5 40.98,56.5 J8.02@41.98,57.5
VCC_3V3: C1.1 C2.2 C5.2 J2.1 J3.2 J6.1 MD1.2 R1.1 R2.2 R3.2 R4.2 U1.2 U1.4 | length 226.3
  Top Layer w0.3: v1(4.5,58.25) 4.5,57 2.5,55 2.5,45.926 2.676,45.75 12.25,45.75 13.75,47.25 13.75,50.026 C1.1@13.75,51.6 ; R4.2@11.75,50.026 13.7,50.026 ; J2.1@46.075,43.55 J2.1@46.17,43.645
  Top Layer w0.5: v1(4.5,58.25) 5.5,59.25 8.5,59.25 10.1,59.25 11.494,57.856 12.592,57.856 12.75,57.698 14.502,57.698 16.119,59.315 MD1.2@18.165,59.315 ; v1(11.5,17.5) 13.946,19.946 17.696,19.946 20.139,22.389 25.566,22.389 27,20.955 27,21.7 ; U1.4@27,27.545 27,21.961 27,21.7 ; R1.1@31.55,15.75 31.55,20.857 31.843,21.15 32.55,21.15 C5.2@33,21.6 ; C5.2@33,21.55 32.85,21.7 29.866,21.7 29.629,21.936 28.851,21.936 28.614,21.7 27,21.7 ; J3.2@37.5,8.25 39.474,10.224 R3.2@39.474,14.2
  Bottom Layer w0.5: v1@4.25,58 1.75,55.5 1.75,43.586 2.043,43.293 8.707,43.293 9.5,42.5 9.5,19.5 v1(11.5,17.5) 7.212,13.212 7.212,11.237 13.009,5.44 37.207,5.44 37.5,5.733 37.5,8.25 41.073,8.25 47.25,14.427 47.25,41.95 J2.1@45.75,43.45
pads on no net: MD1.4 MD1.5 MD1.17 MD1.18 MD1.19 MD1.20 MD1.21 MD1.22 MD1.29 MD1.32

## Polygon pours and split planes (outlines as drawn)
VCC_3V3 on Top Layer "NONET_L01_P-001" (solid, pour order 0): 21,25 21,31.75 33.5,31.75 33.5,25
GND on Bottom Layer "NONET_L01_P-001" (solid, pour order 3): 15.225,60.9 18.975,57.65 33.725,57.65 37.725,60.9 48.475,60.9 49.975,59.4 49.975,1.9 5.975,1.9 0.225,7.65 0.225,55.4 5.725,60.9

## Silkscreen, mask and mechanical layers (free items; w line width, h text height)
Top Overlay:
  text "TX" at 41.304,59.579 h1
  text "RX" at 44.004,59.504 h1
  text "LED" at 49.004,53.746 h1 r270
  text "reset" at 2.458,48.491 h1 r90
  text "BTN02" at 49.004,44.946 h1 r270
  text "PillPal" at 20.5,34 h2
  text "LED" at 2.458,26.991 h1 r90
  text "M_pin" at 49.087,26.446 h1 r270
  text "Boot" at 49.004,9.946 h1 r270
  text "BTN02" at 2.458,8.241 h1 r90
  text "PWR" at 23.754,3.504 h1
  text "SPKR" at 12.851,2.844 h1
  text "M_in" at 33.669,2.828 h1
Mechanical 1:
  lines w0.254: -1,1 -1,62.25 1.25,64.5 5.25,64.5 5.5,64.5 8.25,61.75 43.25,61.75 46.25,64.75 51.25,64.75 53,63 53,1 51,-1 27.75,-1 1,-1 -1,1